# Altium PCB ffan_pcb.PcbDoc
Units mil, origin at the board's own origin, x right, y up, seen from the top; angles counter-clockwise.
Board outline 3600 x 4024.85 mil, 4 copper layers (Top Layer, Internal Plane 1, Internal Plane 2, Bottom Layer), stack 61.634 mil thick; 24 components, 26 nets, 92 pads, 37 vias.
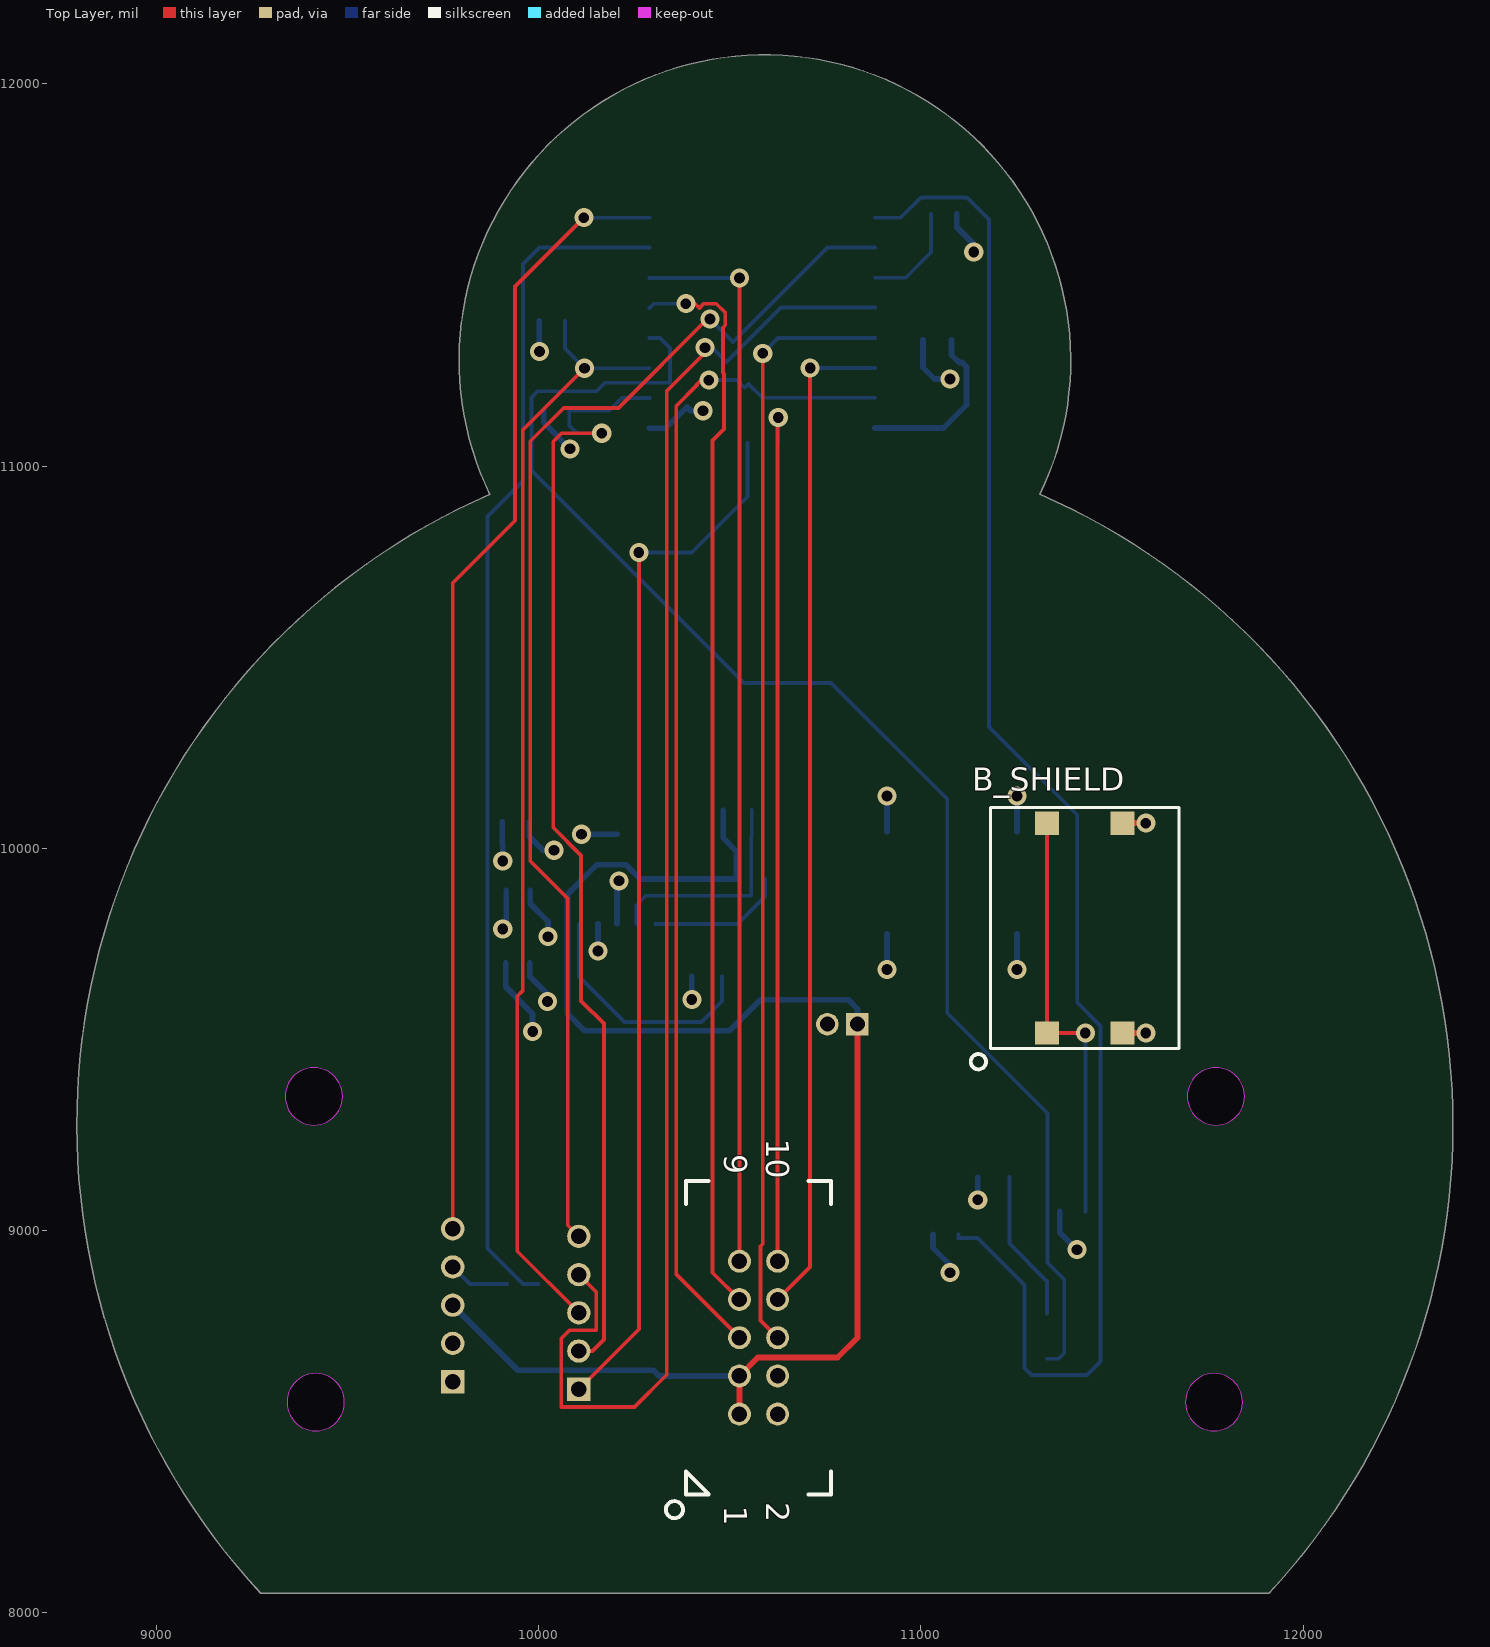
[diagram p0: Top Layer view]
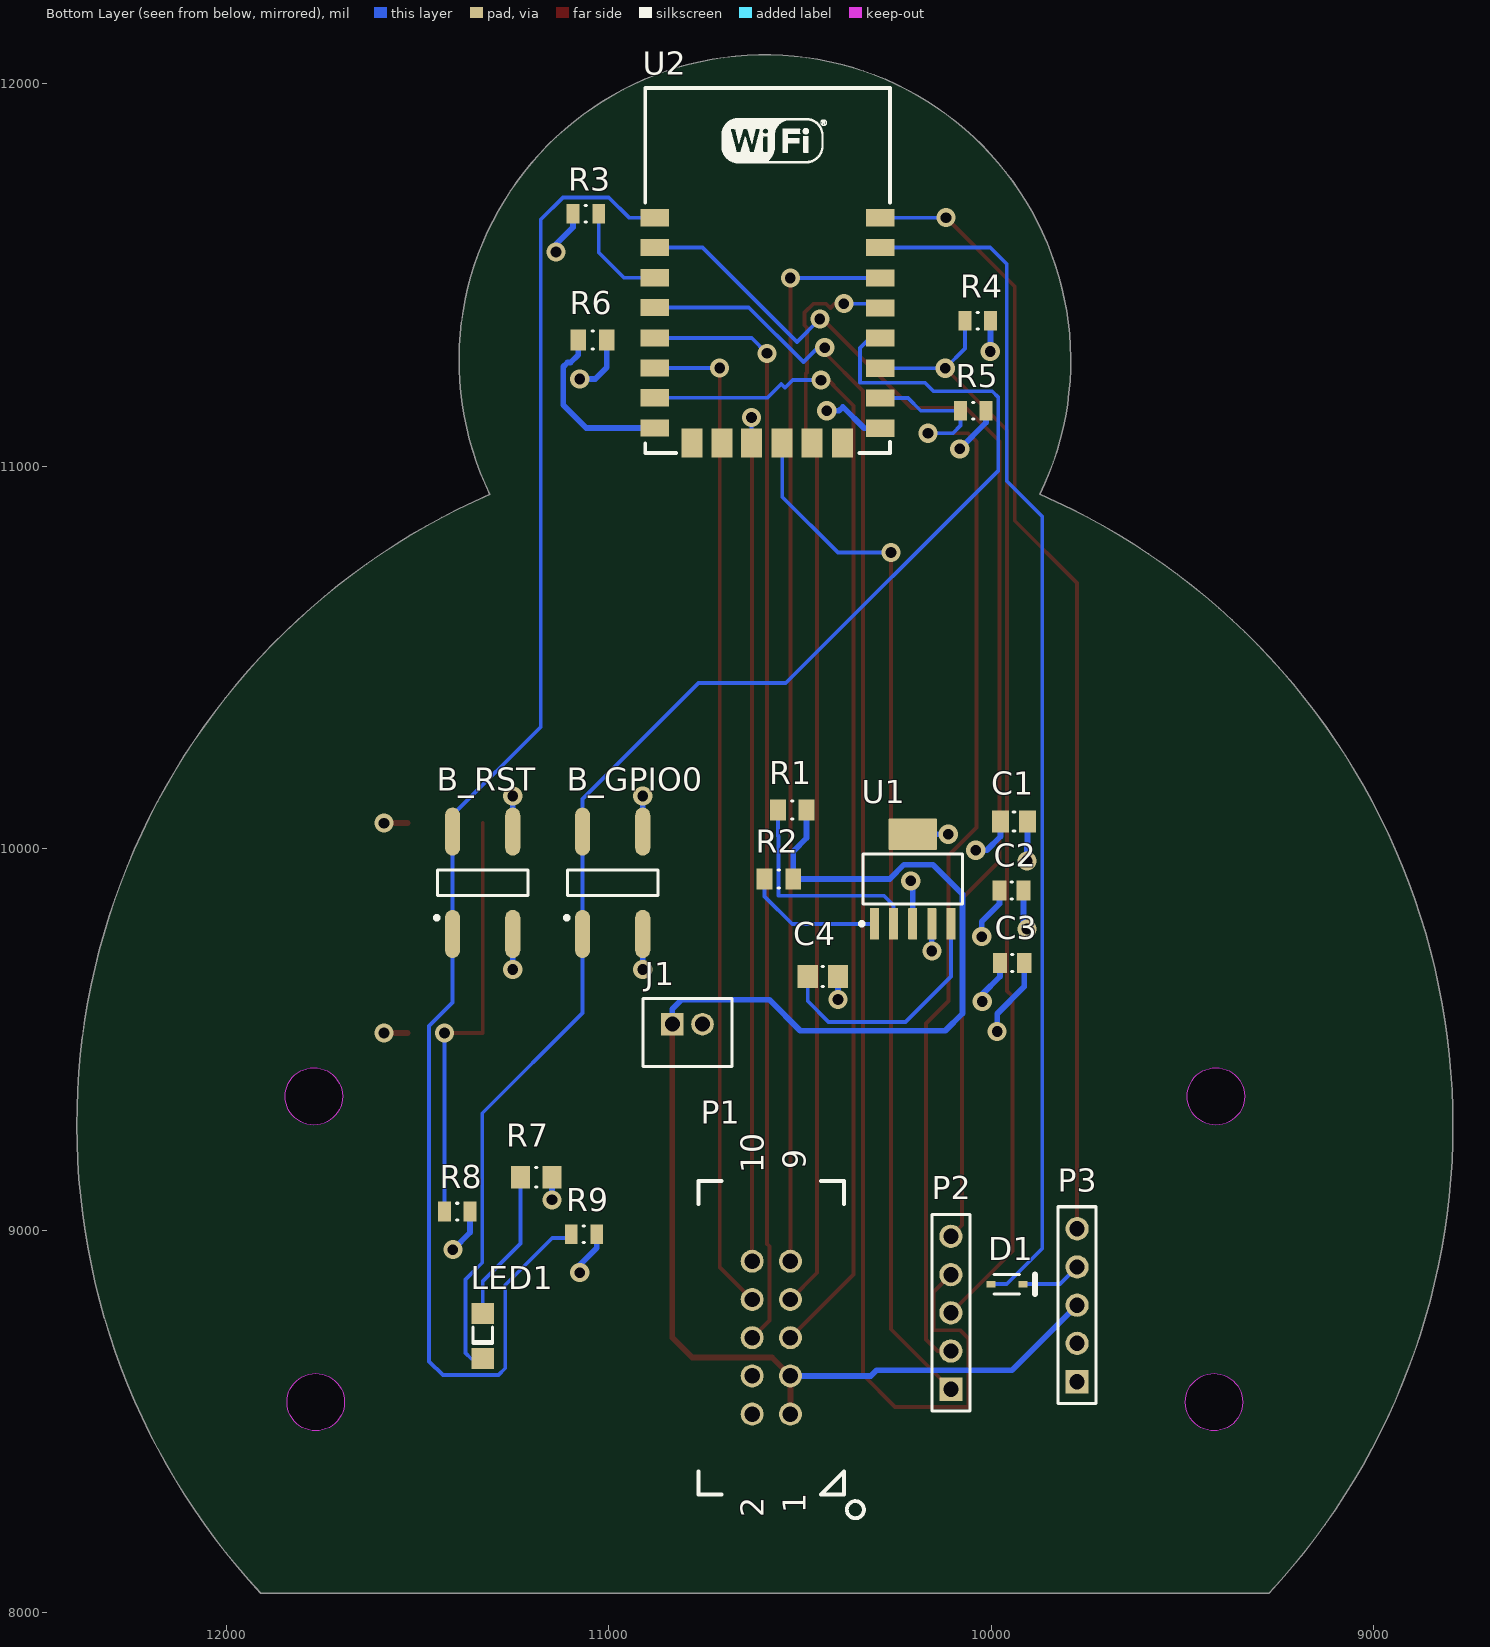
[diagram p1: Bottom Layer view, seen from below]
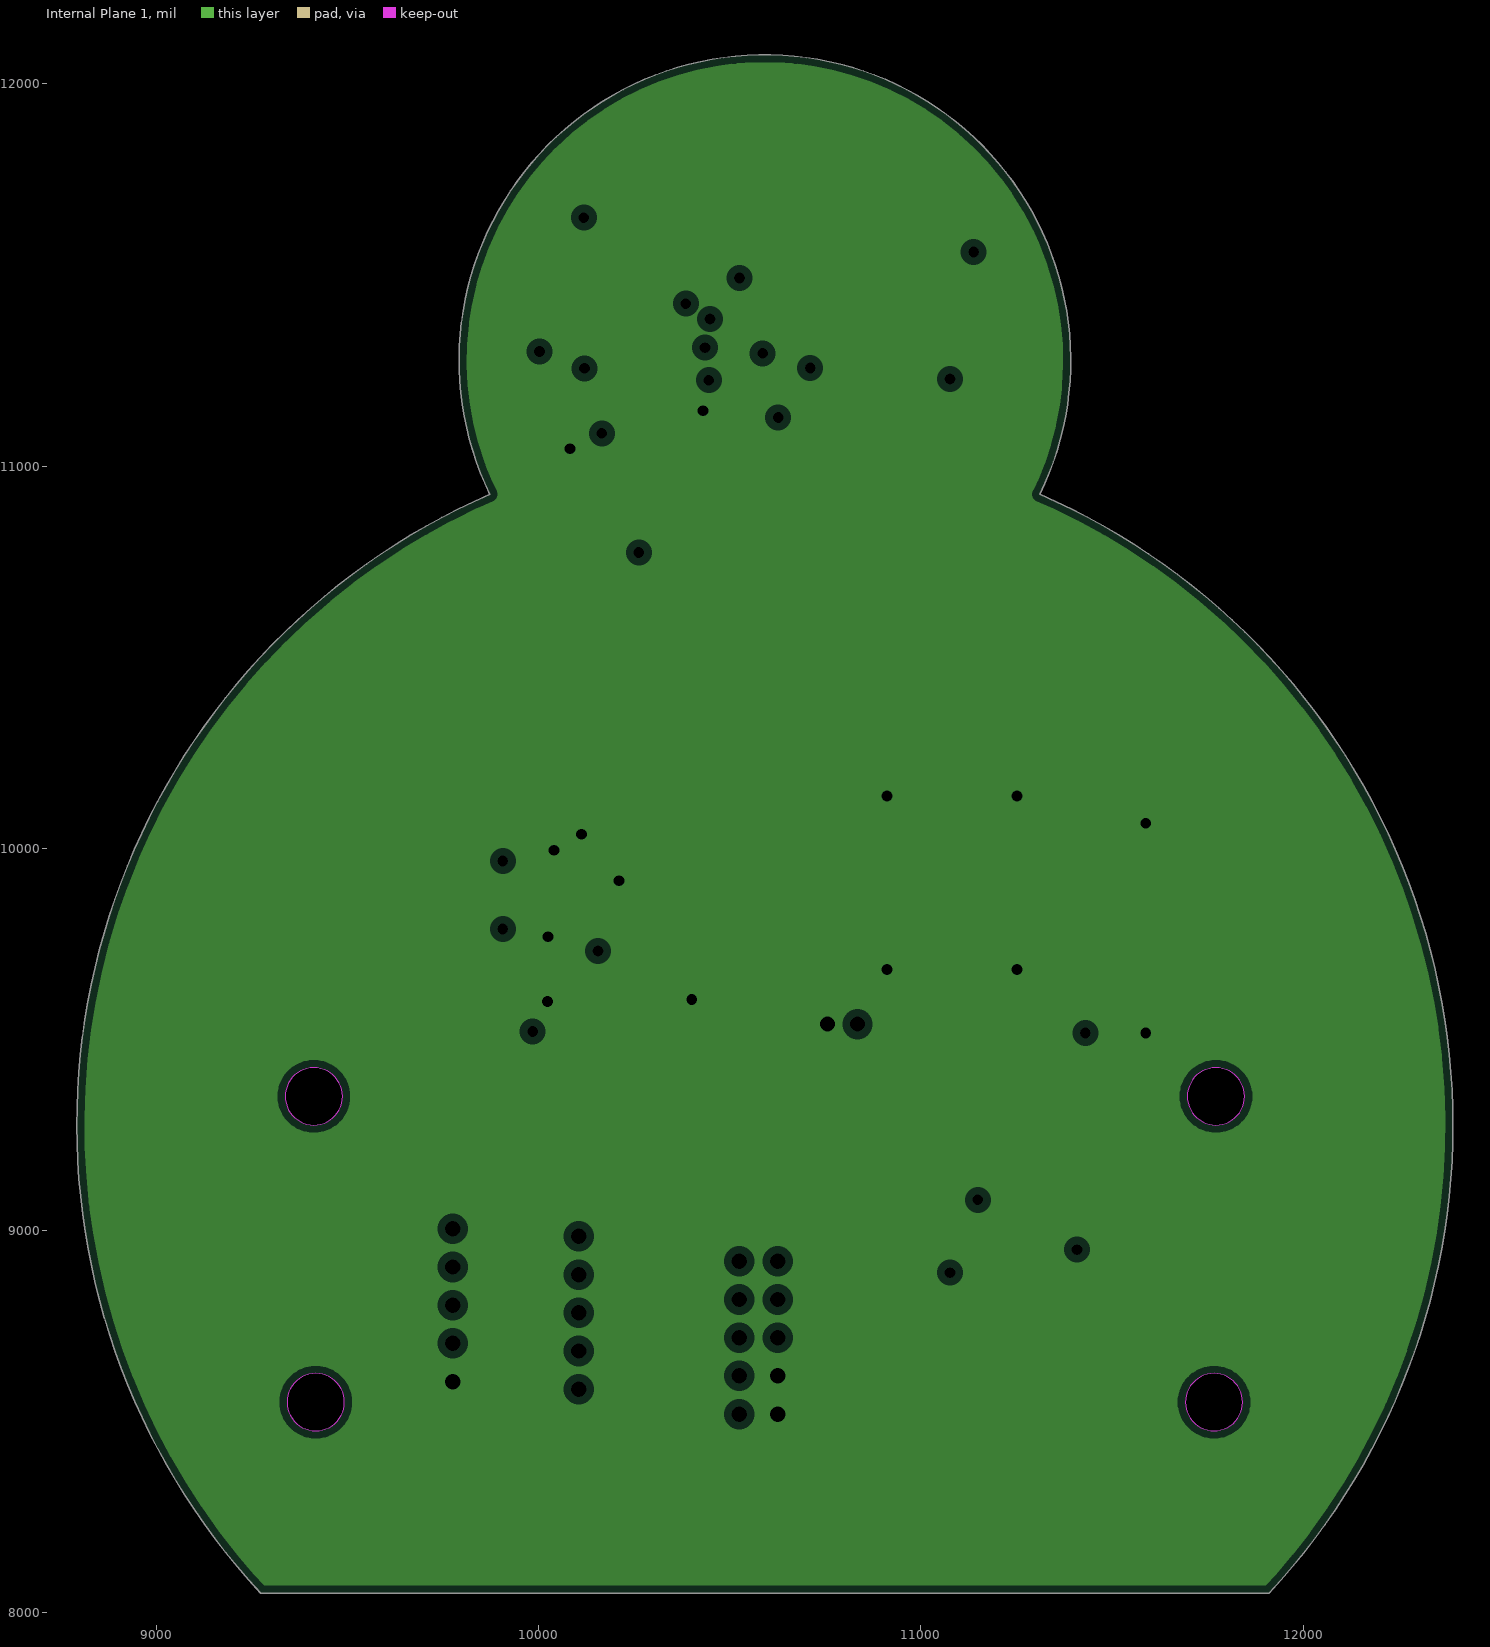
[diagram p2: Internal Plane 1, clearances drawn from the general rule]
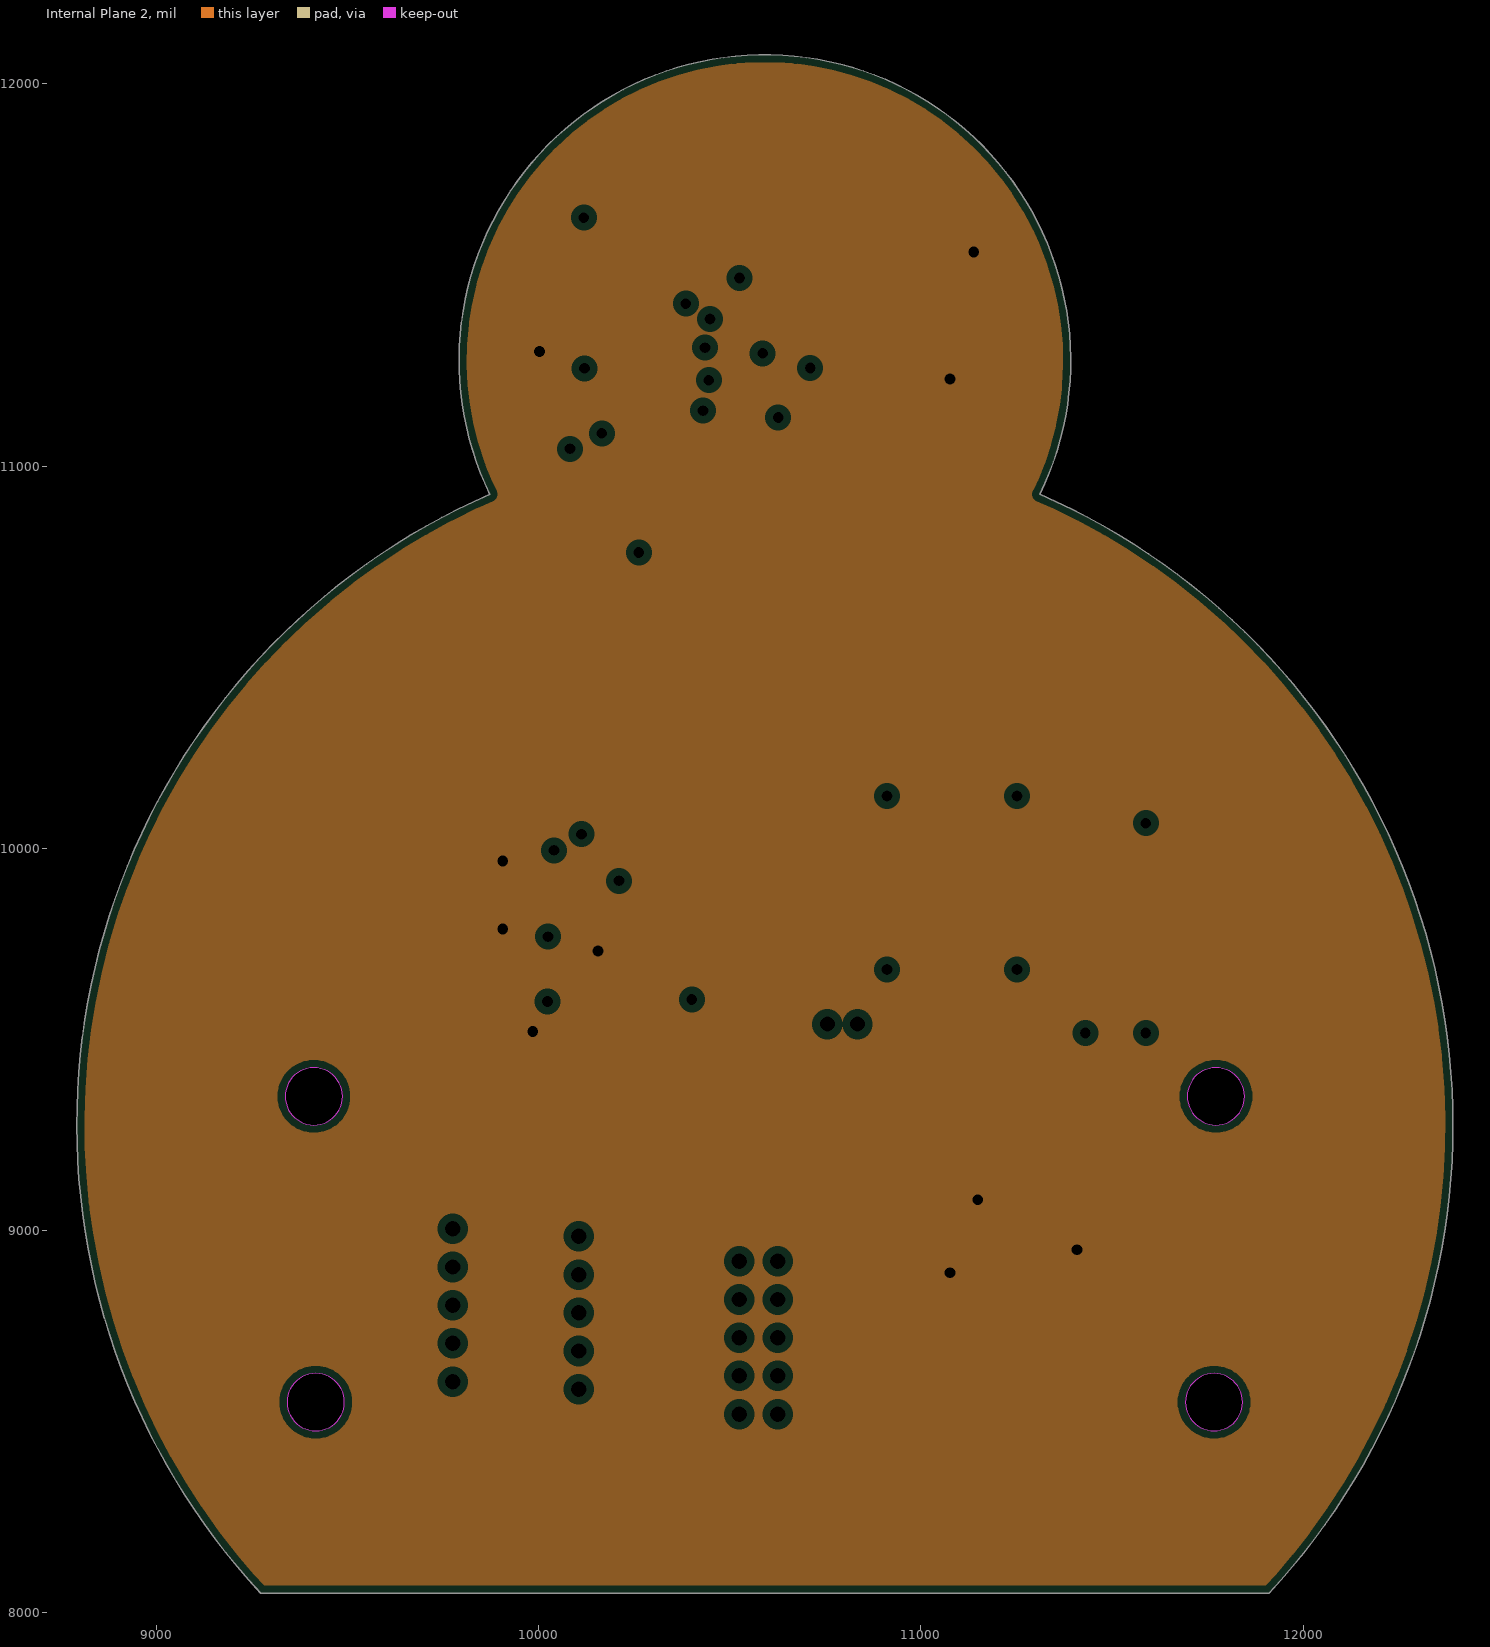
[diagram p3: Internal Plane 2, clearances drawn from the general rule]

## Layer stack, top to bottom
Top Solder: solder mask 0.4, Solder Resist, Dk 3.5
Top Layer: signal copper 1.4
Dielectric 1: core 10, FR-4, Dk 4.2
Internal Plane 1: plane copper 1.417, net GND
Dielectric 3: prepreg 36, Dk 4.2
Internal Plane 2: plane copper 1.417, net 3V3
Dielectric 2: core 10, Dk 4.2
Bottom Layer: signal copper 1.4
Bottom Solder: solder mask 0.4, Solder Resist, Dk 3.5

## Board outline
9272.82,8051.3 11910.53,8051.3 ccw(c10591.68,9276.3) 11311.05,10926.3 ccw(c10591.68,11276.3) 9872.3,10926.3 ccw(c10591.68,9276.3)
cut-out: 11696.68,9351.3 ccw(c11771.68,9351.3) 11771.68,9276.3 ccw(c11771.68,9351.3) 11846.68,9351.3 ccw(c11771.68,9351.3) 11771.68,9426.3 ccw(c11771.68,9351.3)
cut-out: 11691.68,8551.3 ccw(c11766.68,8551.3) 11766.68,8476.3 ccw(c11766.68,8551.3) 11841.68,8551.3 ccw(c11766.68,8551.3) 11766.68,8626.3 ccw(c11766.68,8551.3)
cut-out: 9341.68,8551.3 ccw(c9416.68,8551.3) 9416.68,8476.3 ccw(c9416.68,8551.3) 9491.68,8551.3 ccw(c9416.68,8551.3) 9416.68,8626.3 ccw(c9416.68,8551.3)
cut-out: 9336.68,9351.3 ccw(c9411.68,9351.3) 9411.68,9276.3 ccw(c9411.68,9351.3) 9486.68,9351.3 ccw(c9411.68,9351.3) 9411.68,9426.3 ccw(c9411.68,9351.3)

## Design rules (kind name [scope] priority, off if disabled: settings)
Clearance [All] p1: gap=10 ignorepadtopadclearanceinfootprint=FALSE except(0: Arc-Hole Track-Hole SMDPad-Hole THPad-Hole Via-Hole Fill-Hole Poly-Hole Region-Hole Text-Hole)
PlaneClearance [All] p1: clearance=20
PlaneConnect [All] p1: planeconnectstyle=Relief reliefexpansion=20 reliefentries=4 reliefconductorwidth=10 reliefairgap=10
PolygonConnect [All] p1: connectstyle=Relief reliefconductorwidth=10 reliefentries=4 polygonreliefangle="90 Angle" airgapwidth=10
RoutingVias [All] p1: holewidth=28 width=50 viastyle="Through Hole" minholewidth=28 minwidth=50 maxholewidth=28 maxwidth=50
SilkToSolderMaskClearance [IsPad] p1: minsilkscreentomaskgap=0 clearancetoexposedcopper=TRUE
SolderMaskExpansion [All] p1: expansion=4
Width Width_1 [(InNet('3V3') or InNet('GND') or InNet('ESP_VDD') or InNet('VBATT'))] p1: maxlimit=15 minlimit=15 preferedwidth=15
Width [All] p2: maxlimit=10 minlimit=10 preferedwidth=10
27 further rules are at their usual default settings.

## Components (designator, comment, footprint, x,y, rotation, side; value= is the part's Value field where it differs from the comment)
B_GPIO0 "EVQ-Q2203W" EVQ-Q2203W 10990,9910 r90 bottom
B_RST "EVQ-Q2203W" EVQ-Q2203W 11330,9910 r90 bottom
B_SHIELD "TL3300DF260Q" TL3300DF260Q 11330,9516.91 r90 top
C1 "100nF" CAPC0805(2012)100_N 9940,10070 r180 bottom
C2 "2.2uF" CAPC0805(2012)145_L 9946.5,9890 r180 bottom
C3 "22uF" CAPC0805(2012)145_L 9945,9700 r180 bottom
C4 "10nF" CAPC0805(2012)145_M 10440,9665 r180 bottom
D1 "1N4148WS-7-F" DIOD-SOD323-2-A_V 9958.46,8860 r180 bottom
J1 "B2B-PH-K-S(LF)(SN)" JST-B2B-PH-K-S_V 10794.37,9518.35 r180 bottom
LED1 "150120RS75000" 1206_A 11330,8724.06 r90 bottom
P1 "302-S101" 302-S101 10575,8720 r90 bottom
P2 "TSW-105-05-L-S" SMTC-TSW-105-05-X-S 10105,8585 r90 bottom
P3 "TSW-105-05-L-S" SMTC-TSW-105-05-X-S 9775,8605 r90 bottom
R1 "Jumper 0805" RESC0805(2012)_N 10520,10100 r180 bottom value="0.00 Ohm"
R2 "Jumper 0805" RESC0805(2012)_N 10555,9920 r180 bottom value="0.00 Ohm"
R3 "10K" RESC0805(2012)_L 11060,11660 r180 bottom value="10000.00 Ohm"
R4 "10K" RESC0805(2012)_L 10035,11380 r180 bottom value="10000.00 Ohm"
R5 "10K" RESC0805(2012)_L 10046.54,11145 r180 bottom value="10000.00 Ohm"
R6 "Jumper 0805" RESC0805(2012)_N 11042.6,11330 r180 bottom value="0.00 Ohm"
R7 "200R" RESC0805(2012)_M 11190,9140 r180 bottom value="200.00 Ohm"
R8 "10K" RESC0805(2012)_L 11396.54,9050 r180 bottom value="10000.00 Ohm"
R9 "10K" RESC0805(2012)_L 11065,8990 r180 bottom value="10000.00 Ohm"
U1 "TPS79633DCQG4" DCQ0006A_N 10205,9920 r90 bottom
U2 "ESP8266-12E" ESP8266-12E 10892.5,11650 r180 bottom

## Footprints (in the part's own frame and the unit in brackets; to place one, negate y for a bottom-side part, rotate by r counter-clockwise, add the part's x,y. Pads: shape width x height; smd on the part's side, far side on the other; paste and mask are expansions set on the pad)
302-S101 [mil] "10 Positions Header, Shrouded Connector 0.100\" (2.54mm) Through Hole Gold"
  round 60 hole 40.16: 1(-200,-50) 2(-200,50) 3(-100,-50) 4(-100,50) 5(0,-50) 6(0,50) 7(100,-50) 8(100,50) 9(200,-50) 10(200,50)
  silkscreen extent -472,-242 410,190, body extent -400,-174 400,181, height 350
1206_A [mm] "Chip LED, 2-Leads, Body 3.2x1.6mm, IPC Medium Density"
  rect 1.4x1.5 smd: 1(-1.5,0) 2(1.5,0)
  silkscreen extent -0.5,-0.66 0.6,0.65, body extent -1.6,-0.8 1.6,0.8, height 0.68
CAPC0805(2012)100_N [mm] "Chip Capacitor, Body 2.0x1.2mm, Height 1.0mm, IPC Medium Density"
  rect 1.15x1.45 smd: 1(-0.9,0) 2(0.9,0)
  silkscreen extent -0.05,-0.62 0.05,0.62, body extent -1.1,-0.72 1.1,0.73, height 1
CAPC0805(2012)145_L [mm] "Chip Capacitor, Body 2.0x1.2mm, Height 1.45mm, IPC High Density"
  rect 0.95x1.35 smd: 1(-0.8,0) 2(0.8,0)
  silkscreen extent -0.05,-0.58 0.05,0.58, body extent -1.1,-0.72 1.1,0.72, height 1.45
CAPC0805(2012)145_M [mm] "Chip Capacitor, Body 2.0x1.2mm, Height 1.45mm, IPC Low Density"
  rect 1.35x1.55 smd: 1(-1,0) 2(1,0)
  silkscreen extent -0.05,-0.67 0.05,0.67, body extent -1.1,-0.72 1.1,0.72, height 1.45
DCQ0006A_N [mm] "SOT223, 6-Leads, Body 6.55x3.55mm, Pitch 1.27mm, IPC Medium Density"
  rrect17% 2.1x0.6 smd: 1(-2.975,2.54) 2(-2.975,1.27) 3(-2.975,0) 4(-2.975,-1.27) 5(-2.975,-2.54)
  rrect5% 2.1x3.2 smd: 6(2.975,0)
  silkscreen extent -3.1,-3.3 1.65,3.52, body extent -3.48,-3.25 3.48,3.25, height 1.64
DIOD-SOD323-2-A_V [mm] "SOD-323, 2-Leads, Body 1.7x1.3mm"
  rect 0.59x0.45 smd: 1(-1.055,0) 2(1.055,0)
  silkscreen extent -0.85,-0.65 1.85,0.65, body extent -0.85,-0.65 0.85,0.65, height 1.2
ESP8266-12E [mil] "ESP8266-12E"
  rect 75x45 smd: 1(12.5,0) 2(12.5,-78) 3(12.5,-157) 4(12.5,-235) 5(12.5,-315) 6(12.5,-393) 7(12.5,-471) 8(12.5,-550) 15(602.5,-551) 16(602.5,-472) 17(602.5,-394) 18(602.5,-315) 19(602.5,-236) 20(602.5,-158) 21(602.5,-78) 22(602.5,0)
  rect 55x75 smd: 9(110,-589.5) 10(188,-589.5) 11(266,-589.5) 12(346,-589.5) 13(424,-589.5) 14(504,-589.5)
  silkscreen extent -12,-616 628,339, body extent -8,-611 622,335, height 150
EVQ-Q2203W [mm] "SWITCH TACTILE SPST-NO 0.02A 15V, SOJ, 4-Leads, Body 6.00x6.60mm, Pitch 4.00mm, IPC Medium Density"
  oval 3.2x1 smd: 1(-3.4,2) 2(3.4,2) 3(-3.4,-2) 4(3.4,-2)
  silkscreen extent -2.45,-3 0.85,3.18, body extent -3.27,-2.93 3.33,3.07, height 3.11
JST-B2B-PH-K-S_V [mm] "Connector, 2-Leads, Body 5.9x4.5mm, Pitch 2mm"
  rect 1.5x1.5 hole 1: 1(-1,0.55)
  round 1.5 hole 1: 2(1,0.55)
  silkscreen extent -2.95,-2.25 2.95,2.25, body extent -2.95,-2.25 2.95,2.25, height 6
RESC0805(2012)_L [mm] "Chip Resistor, Body 2.0x1.3mm, IPC High Density"
  rect 0.85x1.3 smd: 1(-0.85,0) 2(0.85,0)
  silkscreen extent -0.05,-0.55 0.05,0.55, body extent -1.1,-0.67 1.1,0.68, height 0.7
RESC0805(2012)_M [mm] "Chip Resistor, Body 2.0x1.3mm, IPC Low Density"
  rect 1.25x1.5 smd: 1(-1.05,0) 2(1.05,0)
  silkscreen extent -0.05,-0.65 0.05,0.65, body extent -1.1,-0.67 1.1,0.67, height 0.7
RESC0805(2012)_N [mm] "Chip Resistor, Body 2.0x1.3mm, IPC Medium Density"
  rect 1.05x1.4 smd: 1(-0.95,0) 2(0.95,0)
  silkscreen extent -0.05,-0.6 0.05,0.6, body extent -1.1,-0.67 1.1,0.68, height 0.7
SMTC-TSW-105-05-X-S [mm] ".025 SQ Post Terminal Strip Assembly, 1x5 Pins, Vertical, 2.54mm Pitch, Male"
  rect 1.55x1.55 hole 1.02: 1(0,0)
  round 1.55 hole 1.02: 2(2.54,0) 3(5.08,0) 4(7.62,0) 5(10.16,0)
  silkscreen extent -1.46,-1.27 11.62,1.27, body extent -1.27,-1.27 11.43,1.27, height 5.21
TL3300DF260Q [mm] "SWITCH TACTILE SPST-NO 0.05A 12V"
  rect 1.55x1.6 smd: 1(0,0) 2(13.95,0) 3(0,-5) 4(13.95,-5)
  silkscreen extent -2.41,-8.77 14.99,5.08, body extent -0.52,-8.51 14.49,3.49, height 4.3

## Part data
B_GPIO0 B_RST: "SWITCH TACTILE SPST-NO 0.02A 15V", Contact Rating @ Voltage="0.02A @ 15VDC", Illumination Type, Color=-, Manufacturer="Panasonic Electronic Components", Operating Force=350gf, Operating Temperature="-40°C ~ 85°C", Supplier Part Number 1=P12964SCT-ND, Actuator Height off PCB, Vertical=3.10mm, Actuator Length, Right Angle=-, Actuator Material=-, Actuator Orientation="Top Actuated", Actuator Type=Standard, Category=Switches, Circuit=SPST-NO, ComponentLink1Description=https://industrial.panasonic.com/cdbs/www-data/pdf/ATK0000/ATK0000CE28.pdf, ComponentLink1URL=https://industrial.panasonic.com/cdbs/www-data/pdf/ATK0000/ATK0000CE28.pdf, Features="Grounding Pin", Illumination=Non-Illuminated, Illumination Voltage (Nominal)=-, Ingress Protection=-, Manufacturer Part Number=EVQ-Q2203W, Mechanical Life="100,000 Cycles", Mounting Type="Surface Mount", Outline="6.60mm x 6.00mm", Packaging="Cut Tape (CT)", Part Status=Active, Pricing 1="1=0.3, 10=0.287, 25=0.2772, 50=0.2674, 100=0.2525, 250=0.2376, 500=0.2277, 1000=0.17325 (USD)", RoHS="RoHS Compliant", Stock 1=15024, Supplier 1=Digi-Key, Switch Function=Off-Mom, Switch Travel=0.25mm, Termination Style="J Lead"
B_SHIELD: "SWITCH TACTILE SPST-NO 0.05A 12V", Case/Package=SMD/SMT, Current Rating=50mA, Manufacturer=E-Switch, Max Operating Temperature=70°C, Min Operating Temperature=-25°C, Operating Force=260gf, Package Quantity=1, Supplier Part Number 1=EG4907CT-ND, Voltage Rating (DC)=12V, ComponentLink1Description=https://datasheet.ciiva.com/2901/n301104-2901040.pdf, ComponentLink1URL=https://datasheet.ciiva.com/2901/n301104-2901040.pdf, Contact Plating=Silver, Illumination Type=Non-Illuminated, Lead Free="Lead Free", Manufacturer Part Number=TL3300DF260Q, Mechanical Life=100000Cycles, Packaging="Tape and Reel", Pricing 1="1=0.55, 10=0.529, 25=0.5188, 50=0.4992, 100=0.4308, 250=0.3916 (USD)", Stock 1=7332, Supplier 1=Digi-Key, Switch Travel=0.35mm, Termination="Gull Wing", Throw Configuration=SPST
C1: library part CMP-1036-04396-1, "CAP 100nF 10V ±20% 0805 (2012 Metric) Thickness 1mm SMD", Case-EIA=0805, Case-Metric=2012, Rated Voltage="10 V", Tolerance=±20%, Max Thickness="1 mm", Technology=SMT
C2: library part CMP-1036-04826-1, "CAP 2.2uF 10V ±20% 0805 (2012 Metric) Thickness 1.45mm SMD", Case-EIA=0805, Case-Metric=2012, Rated Voltage="10 V", Tolerance=±20%, Max Thickness="1.45 mm", Technology=SMT
C3: library part CMP-1036-04942-1, "CAP 22uF 10V ±10% 0805 (2012 Metric) Thickness 1.45mm SMD", Case-EIA=0805, Case-Metric=2012, Rated Voltage="10 V", Tolerance=±10%, Max Thickness="1.45 mm", Technology=SMT
C4: library part CMP-1036-03808-1, "CAP 10nF 10V ±10% 0805 (2012 Metric) Thickness 1.45mm SMD", Case-EIA=0805, Case-Metric=2012, Rated Voltage="10 V", Tolerance=±10%, Max Thickness="1.45 mm", Technology=SMT
D1: library part CMP-1667-00004-1, "Fast Switching Diode, 75 V, 0.3 A, -65 to 150 degC, 2-Pin SOD323, RoHS, Tape and Reel", ComponentLink1Description="Manufacturer URL", ComponentLink1URL=http://www.diodes.com/, ComponentLink2Description=Datasheet, ComponentLink2URL=http://www.diodes.com/datasheets/ds30097.pdf, DatasheetVersion="Rev. 25-2, 03/2016", PackageDescription="2-Pin Small Outline Diode, Body 1.7 x 1.3 mm", PackageReference=SOD323-2
J1: library part CMP-2000-05162-1, "Male Header, Pitch 2 mm, 1 x 2 Position, Height 6 mm, Tail Length 3.4 mm, -25 to 85 degC, RoHS, Bulk", Manufacturer=JST, Datasheet URL=http://datasheet.octopart.com/B2B-PH-K-S%28LF%29%28SN%29-JST-datasheet-8324864.pdf, Datasheet Version=Nov-08, Manufacturer URL=http://www.jst.com/home2.html, No of Positions=2, Pitch=2mm, Style/Orientation=StraightHeader/Plug, Termination=Crimp, Type=ShroudedHeader
LED1: library part CMP-1426-00013-1, "SMD mono-color Chip LED, WL-SMCW, Red", Color=Red, Manufacturer="Wuerth Elektronik", ComponentLink1Description="Manufacturer URL", ComponentLink1URL=http://www.we-online.com, ComponentLink2Description=Datasheet, ComponentLink2URL=http://katalog.we-online.com/led/datasheet/150120RS75000.pdf, PackageReference=1206_A, PartNumber=150120RS75000
P1: "10 Positions Header, Shrouded Connector 0.100\" (2.54mm) Through Hole Gold", Case/Package=100, Colour=Black, Manufacturer="On-Shore Technology", Supplier Part Number 1=ED1543-ND, ComponentLink1Description=https://datasheet.ciiva.com/732/302-sxxx-732946.pdf, ComponentLink1URL=https://datasheet.ciiva.com/732/302-sxxx-732946.pdf, Connector Type="Male Pin", Contact Plating=Gold, Manufacturer Part Number=302-S101, Mount="Through Hole", Number of Positions=10, Number of Rows=2, Packaging=Tray, Pitch=0.1inch, Pricing 1="1=0.28, 10=0.263, 100=0.1838, 500=0.1575, 1000=0.1313, 5000=0.1125, 10000=0.105 (USD)", Row Spacing=0.1inch, Stock 1=89519, Supplier 1=Digi-Key, Termination=Solder
P2 P3: library part CMP-1024-00366-1, Manufacturer=Samtec, Temperature Range="-55 to 125 degC", ComponentLink1Description="Manufacturer URL", ComponentLink1URL=http://www.samtec.com, ComponentLink2Description=Datasheet, ComponentLink2URL=http://www.samtec.com/documents/webfiles/pdf/TSW_TH.PDF, ComponentLink3Description="Package Specification", ComponentLink3URL=http://www.samtec.com/documents/webfiles/cpdf/TSW-XXX-XX-XXX-X-XX-XXX-MKT.pdf, DatasheetVersion=F-214, Mounting Technology=Through-hole, Orientation=Vertical, PackageDescription=".025[0.64] SQ. Post Terminal Strip Assembly", PackageReference=TSW-105-05-X-S, PackageVersion="DM, 8/1988", PartNumber=TSW-105-05-L-S, Pitch="2.54 mm", RoHS=True
R1 R2 R6: library part CMP-1013-00001-1, "Jumper 0805 (2012 Metric)", Case-EIA=0805, Case-Metric=2012, Power=None, Technology=SMT, Tolerance=None
R3 R4 R5 R8 R9: library part CMP-1013-00098-1, "10K 0.125W 5% 0805 (2012 Metric)  SMD", Case-EIA=0805, Case-Metric=2012, Power="0.125 W", Tolerance="5 %", Technology=SMT
R7: library part CMP-1013-00057-1, "200R 0.125W 5% 0805 (2012 Metric)  SMD", Case-EIA=0805, Case-Metric=2012, Power="0.125 W", Tolerance="5 %", Technology=SMT
U1: library part CMP-0395-00338-2, "Single Output High PSRR LDO, 1 A, Fixed 3.3 V Output, 2.7 to 5.5 V Input, 6-pin SOT-223 (DCQ), -40 to 125 degC", Manufacturer="Texas Instruments", Accuracy(%)=2, ComponentLink1Description="Manufacturer URL", ComponentLink1URL=http://www.ti.com/, ComponentLink2Description=Datasheet, ComponentLink2URL=http://www.ti.com/general/docs/lit/getliterature.tsp?genericPartNumber=TPS79633&fileType=pdf, ComponentLink3Description="Package Specification", ComponentLink3URL=http://www.ti.com/litv/pdf/mpds098c, DatasheetVersion=SLVS351N, Fixed Output Options(V)=3.3, Iout(Max)(A)=1, Iq(Typ)(mA)=0.26, Mounting Technology="Surface Mount", PackageDescription="6-Pin Plastic Small Outline, Body 3.5 x 6.5 mm, Pitch 1.27 mm", PackageReference=DCQ0006A, PackageVersion=4202109/D, PartNumber=TPS79633DCQG4, SubFamily="Single Channel LDO", Vdo(Typ)(mV)=220, Vin(Max)(V)=5.5, Vin(Min)(V)=2.7, Vout Adj(Max)(V)=3.3, Vout Adj(Min)(V)=3.3
U2: Case/Package=Module, Current - Receiving=56mA, Current - Transmitting=170mA, Frequency=2.4GHz, Manufacturer="Adafruit Industries", Manufacturer Part Number=2491, Max Operating Temperature=125°C, Min Operating Temperature=-40°C, Supplier Part Number 1=1528-1438-ND, Data Rate=72.2Mbps, Interface=I2C,SPI,UART, Packaging=Bulk, Pricing 1="1=6.95, 10=6.255 (USD)", Sensitivity=-91dBm, Stock 1=713, Supplier 1=Digi-Key

## Via types
v1: diameter 50, hole 28, Top Layer to Bottom Layer, 37 vias

## Nets (pads, with @x,y where several pads share a name; then routed paths per layer and width w, separated by ;. In a path a pad name is that pad's centre, name@x,y a point inside that pad or via, vN(x,y) a via of type N, cw(c..) or ccw(c..) an arc to the next point about the centre after c; other vN are vias at no path point)
3V3: C1.2 C2.2 C3.2 R3.1 R4.2 R6.2 R7.2 R8.2 R9.2 U1.4 | length 1136.9
  Bottom Layer w15: C1.2 9904.57,10010.48 9906,10009.04 v1(9906,9967.21) ; v1(9906,9789.18) 9915,9798.18 C2.2 ; C3.2 9913.5,9637.98 9984,9567.48 v1(9984,9521.18) ; R4.2 10001.54,11310.21 10002,11309.75 v1(10002,11300.16) ; v1(10155,9731.53) U1.4 ; R6.2 11005.2,11258.25 11035.25,11228.19 v1(11076,11228.19) ; R9.2 11031.54,8954.94 11076,8910.48 v1(11076,8890.16) ; R3.1 11093.46,11624.98 11138,11580.44 v1(11138,11560.16) ; v1(11148.66,9080.47) R7.2 ; R8.2 11363.07,8995.09 v1(11408,8950.16)
ADC: P2.5 U2.2 | length 3294.3
  Top Layer w10: P2.5 10076,9014 10076,9869 9978,9967 9978,11065 10065.41,11152.41 10208.41,11152.41 10441,11385 v1(10448,11385)
  Bottom Layer w10: v1(10448,11385) 10508,11325 10755,11572 U2.2
AIN1: P1.6 U2.5 | length 2906.7
  Top Layer w10: v1(10586,11295) 10586,8965 10580,8959 10580,8765 P1.6
  Bottom Layer w10: v1(10586,11295) 10626,11335 U2.5
AIN2: P1.8 U2.6 | length 2642.2
  Top Layer w10: P1.8 10710,8905 v1(10710,11257)
  Bottom Layer w10: v1(10710,11257) U2.6
B_SHIELD: B_SHIELD.1 B_SHIELD.2 R8.1 | length 1116.1
  Top Layer w10: B_SHIELD.2 B_SHIELD.1 v1(11430,9516.91)
  Bottom Layer w10: R8.1 v1(11430,9516.91)
BIN1: P1.7 U2.19 | length 2848.3
  Top Layer w10: v1(10385,11425) 10409.43,11425 10420.43,11414 10431.43,11425 10464.57,11425 10488,11401.57 10488,11368.43 10481.75,11362.18 10481.75,11244.82 10485,11241.57 10485,11097.25 10455,11067.25 10455,8890 P1.7
  Bottom Layer w10: U2.19 10301,11425 v1(10385,11425)
BIN2: P1.9 U2.20 | length 2807
  Top Layer w10: P1.9 v1(10525,11492)
  Bottom Layer w10: U2.20 v1(10525,11492)
EN: R2.1 U1.1 | length 363.9
  Bottom Layer w10: U1.1 10305,9802 10520,9802 10592.4,9874.4 R2.1
ESP_EN: R3.2 U2.3 | length 274.6
  Bottom Layer w10: U2.3 10960,11493 11026.54,11559.54 R3.2
ESP_VDD: R6.1 U2.8 | length 454.7
  Bottom Layer w15: U2.8 11059,11100 11119,11160 11119,11260 11108,11271 11100,11271 11080,11291 R6.1
GND: B_GPIO0.3 B_GPIO0.4 B_RST.3 B_RST.4 B_SHIELD.3 B_SHIELD.4 C1.1 C2.1 C3.1 C4.2 J1.2 P1.2 P1.4 P3.1 R5.2 U1.3 U1.6 U2.15 | length 1437
  Top Layer w15: B_SHIELD.3 v1(11588.35,9516.91) ; B_SHIELD.4 v1(11588.35,10066.13)
  Bottom Layer w15: C1.1 9975.43,10031.04 10011.48,9995 v1(10040,9995) ; C3.1 9976.5,9664.98 10023,9618.48 v1(10023,9599.18) ; C2.1 9977.99,9854.98 10024.5,9808.48 v1(10024.5,9769.18) ; R5.2 10013.07,11114.09 v1(10082,11045.16) ; v1(10112.01,10037.13) U1.6 ; U1.3 10205,9910 v1(10210,9915) ; U2.15 10331.7,11099 10387.7,11155 10397.7,11145 v1(10430,11145) ; v1(10400.63,9604.49) C4.2 ; v1(10911.26,9683.15) B_GPIO0.3 ; B_GPIO0.4 v1(10911.26,10136.85) ; v1(11251.26,9683.15) B_RST.3 ; B_RST.4 v1(11251.26,10136.85)
GPIO0: B_GPIO0.1 B_GPIO0.2 LED1.1 U2.18 | length 3794.7
  Bottom Layer w10: U2.18 10317,11335 10343,11309 10343,11218 10173,11218 10151,11196 9997,11196 9981,11180 9981,10989 10537,10433 10765,10433 11068.74,10129.26 B_GPIO0.2 B_GPIO0.1 11068.74,9569.26 11331,9307 11331,8916 11375,8872 11375,8680 11360,8665 LED1.1
GPIO2: P2.3 R4.1 U2.17 | length 2925.9
  Top Layer w10: P2.3 9944,8946 9944,9613 9958,9627 9958,11094 v1(10120,11256)
  Bottom Layer w10: R4.1 10068.46,11307.54 v1(10120,11256) U2.17
GPIO10: P2.1 U2.12 | length 2739.5
  Top Layer w10: P2.1 10262,8742 v1(10262,10774)
  Bottom Layer w10: v1(10262,10774) 10400.5,10774 10546.5,10920 U2.12
GPIO15: P2.2 R5.1 U2.16 | length 2973.9
  Top Layer w10: P2.2 10140.51,8685 10170.51,8715 10170.51,9541.49 10111,9601 10111,9981.56 10038,10054.56 10038,11064 10060,11086 v1(10165,11086)
  Bottom Layer w10: v1(10165,11086) 10100,11086 10080,11106 R5.1 10184,11145 10217,11178 U2.16
GPIO16: P2.4 U2.4 | length 4002.3
  Top Layer w10: P2.4 10150.51,8839.49 10150.51,8740 10080,8739 10059,8718 10059,8539 10251,8539 10335,8623 10335,11196.57 10435,11296.57 v1(10435,11310)
  Bottom Layer w10: v1(10435,11310) 10453,11310 10491,11272 10634,11415 U2.4
IN: R1.1 U1.2 | length 583.5
  Bottom Layer w10: U1.2 10255,9851 10280,9876 10555,9876 10556,9877 10556,10031 10557.4,10032.4 R1.1
NetLED1_2: LED1.2 R7.1 | length 397.8
  Bottom Layer w10: R7.1 11231.34,8966 11330,8867.34 LED1.2
nFAULT: P1.10 U2.11 | length 2274.1
  Top Layer w10: P1.10 10625,11125.5 v1(10626.5,11127)
  Bottom Layer w10: U2.11 v1(10626.5,11127)
NR: C4.1 U1.5 | length 648.9
  Bottom Layer w10: U1.5 10105,9665 10224,9546 10425.37,9546 10479.37,9600 C4.1
nSLEEP: P1.5 U2.7 | length 3085.4
  Top Layer w10: v1(10445,11225) 10425,11225 10412,11212 10414,11212 10360,11158 10360,8885 P1.5
  Bottom Layer w10: v1(10445,11225) 10519,11225 10539,11205 10549,11215 10585,11179 U2.7
RST_N: B_RST.1 B_RST.2 R9.1 U2.1 | length 4123.8
  Bottom Layer w10: U2.1 10947,11650 11000,11703 11120,11703 11178,11645 11178,10317.74 11408.74,10087 B_RST.2 B_RST.1 11408.74,9597 11470,9535.74 11470,8658 11434,8622 11289,8622 11271,8640 11271,8858 11148,8981 11098.46,8981 R9.1
RXD_5V: D1.2 P3.4 | length 160.6
  Bottom Layer w10: P3.4 9820,8860 D1.2
RXD_ESP: D1.1 U2.21 | length 3135.9
  Bottom Layer w10: D1.1 9959,8860 9866,8953 9866,10868 9959,10961 9959,11529 10002,11572 U2.21
TXD_ESP: P3.5 U2.22 | length 2959.1
  Top Layer w10: P3.5 9775,10694 9938,10857 9938,11470 v1(10118,11650)
  Bottom Layer w10: v1(10118,11650) U2.22
VBATT: J1.1 P1.1 P1.3 P3.3 R1.2 R2.2 | length 3954.9
  Top Layer w15: P1.1 P1.3 10573,8668 10781.74,8668 10833.74,8720 J1.1
  Bottom Layer w15: P3.3 9945,8635 10300,8635 10315,8620 P1.3 ; R1.2 10482.6,10027 10517.6,9992 R2.2 10265.1,9920 10227.6,9957.5 10152.5,9957.5 10075,9880 10075,9568 10120,9523 10499,9523 10580,9604 10810,9604 10834,9580 10834,9540 J1.1
pads on no net: P3.2 U2.9 U2.10 U2.13 U2.14

## Polygon pours and split planes (outlines as drawn)
GND on Internal Plane 1 (split plane): 221 vertices, not listed, extent 8811.45,8071.39 12371.9,12056.2
3V3 on Internal Plane 2 (split plane): 221 vertices, not listed, extent 8811.45,8071.39 12371.9,12056.2

## Silkscreen, mask and mechanical layers (free items; w line width, h text height)
Mechanical 31:
  circle w0.5: c9416.68,8551.3 r75
  circle w0.5: c9411.68,9351.3 r75
  circle w0.5: c11766.68,8551.3 r75
  circle w0.5: c11771.68,9351.3 r75
  lines w0.5: 9411.68,9351.3 11771.68,9351.3 ; 10591.68,8051.3 10591.68,11276.3
Mechanical 32:
  the board outline again, w0.5

## Text inside footprints (layer, text, board x,y; h text height)
P1: Top Overlay "1" at 10485,8280 h60 r270; Top Overlay "2" at 10595,8290 h60 r270; Top Overlay "9" at 10485,9200 h60 r270; Top Overlay "10" at 10595,9240 h60 r270; Bottom Overlay "2" at 10595,8250 h60 r270; Bottom Overlay "1" at 10485,8260 h60 r270; Bottom Overlay "9" at 10485,9160 h60 r270; Bottom Overlay "10" at 10595,9150 h60 r270
U2: Mechanical 13 "ANTENNA AREA" at 10892.46,11964.59 h10; Mechanical 13 "CUTOUT POLYGON" at 10892.46,11944.59 h10